# Altium PCB PCB1.PcbDoc
Units mm, origin at the board's own origin, x right, y up, seen from the top; angles counter-clockwise.
Board outline 85 x 101.6 mm, 2 copper layers (Top Layer, Bottom Layer); 72 components, 52 nets, 225 pads, 0 vias.
Unrouted connection lines stored in the file: 138.
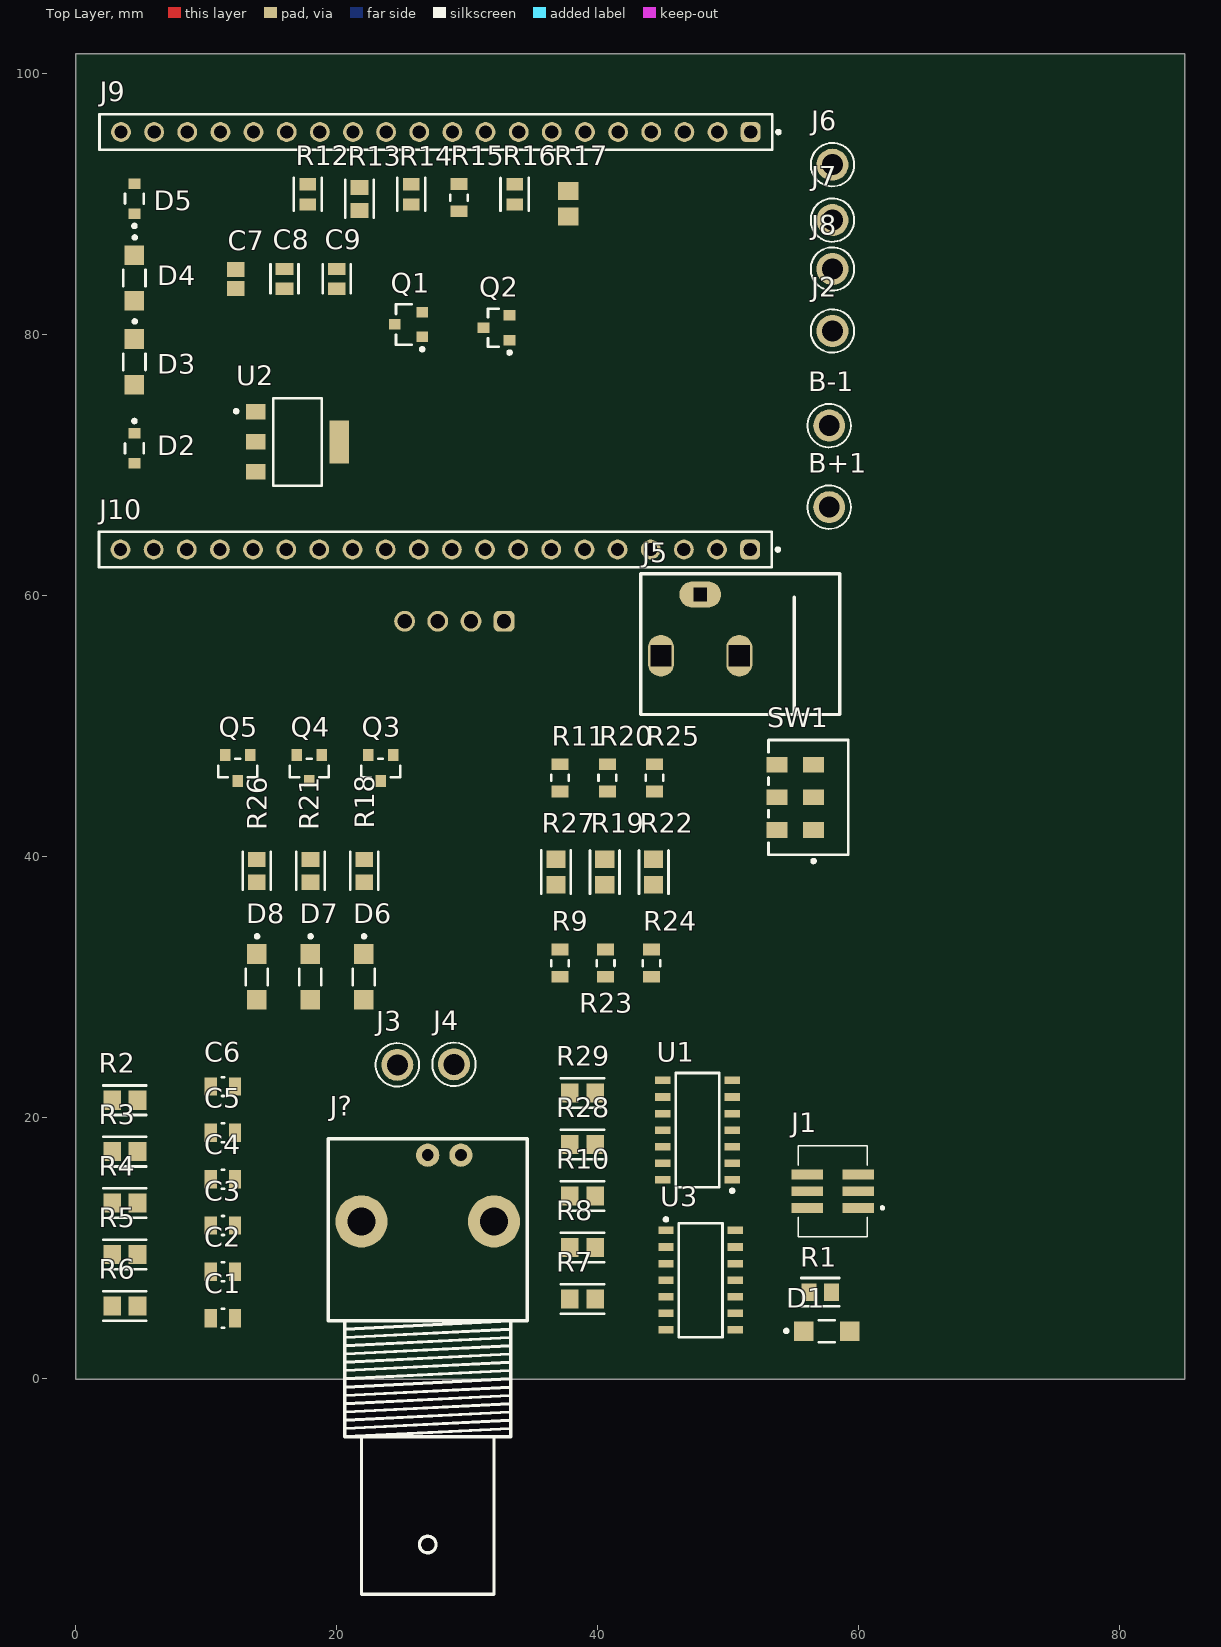
[diagram p0: Top Layer view]
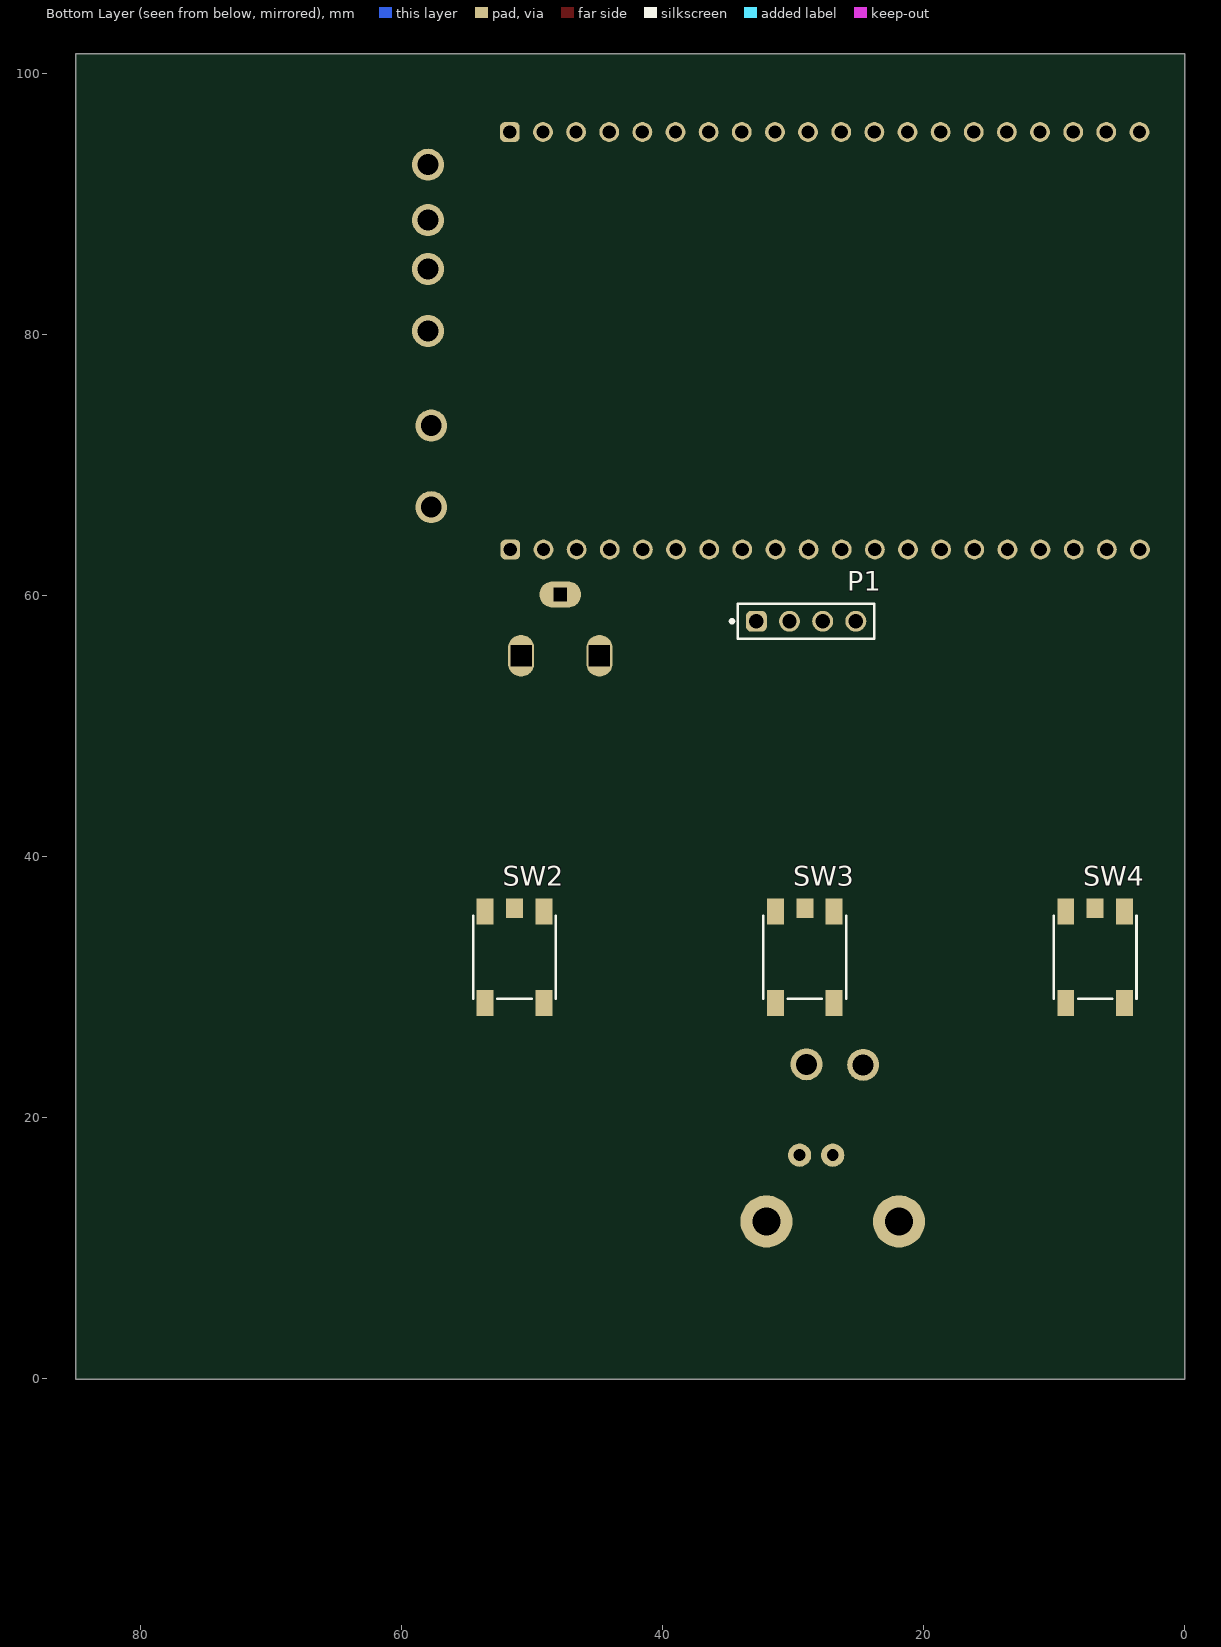
[diagram p1: Bottom Layer view, seen from below]

## Layer stack, top to bottom
Top Solder: solder mask 0.0102, Solder Resist, Dk 3.5
Top Layer: signal copper 0.0356
Dielectric 1: dielectric 0.32, FR-4, Dk 4.8
Bottom Layer: signal copper 0.0356
Bottom Solder: solder mask 0.0102, Solder Resist, Dk 3.5

## Board outline
0,-0.1 85,-0.1 85,101.5 0,101.5

## Design rules (kind name [scope] priority, off if disabled: settings)
Clearance [All] p1: gap=0.254 ignorepadtopadclearanceinfootprint=FALSE
PolygonConnect [All] p1: connectstyle=Relief reliefconductorwidth=0.254 reliefentries=4 polygonreliefangle="90 Angle" airgapwidth=0.254
RoomDefinition r [InComponentClass('r')] p1: confinementstyle=ConfineIn formatcopy=TRUE lockcomponents=FALSE outline 1.073,60.29 54.823,60.29 54.823,98.79 1.073,98.79
RoomDefinition Sheet3 [InComponentClass('Sheet3')] p2: confinementstyle=ConfineIn formatcopy=TRUE lockcomponents=FALSE outline -1.25,99.5 -1.25,38.5 60.25,38.5 60.25,99.5
RoomDefinition Sheet2 [InComponentClass('Sheet2')] p3: confinementstyle=ConfineIn formatcopy=TRUE lockcomponents=FALSE outline 0.9,27.25 0.9,-22.75 52,-22.75 52,27.25
RoomDefinition Sheet4 [InComponentClass('Sheet4')] p4: confinementstyle=ConfineIn formatcopy=TRUE lockcomponents=FALSE outline 2.255,25.75 61,25.75 61,62 2.255,62
RoomDefinition "Top Level" [InComponentClass('Top Level')] p5: confinementstyle=ConfineIn formatcopy=TRUE lockcomponents=FALSE outline 63,1.25 63,20.25 51.5,20.25 51.5,1.25
RoutingVias [All] p1: holewidth=0.711 width=1.27 viastyle="Through Hole" minholewidth=0.711 minwidth=1.27 maxholewidth=0.711 maxwidth=1.27
SolderMaskExpansion [All] p1: expansion=0.102 istentingtop=FALSE
SupplyNets "Schematic Supply Nets_1" [InNet('GND')] p1: voltage=0.000
SupplyNets "Schematic Supply Nets" [InNet('+3V3')] p2: voltage=0.000
Width [All] p1: maxlimit=0.254 minlimit=0.254 preferedwidth=0.254
30 further rules are at their usual default settings.

## Classes and differential pairs
component class "Top Level": J9 J10
component class Sheet4: C1 C2 C3 C4 C5 C6 J3 J4 J? R2 R3 R4 R5 R6 R7 R8 R10 R28 R29 U1 U3
component class Sheet3: D1 J1 R1
component class Sheet2: B+1 B-1 C7 C8 C9 D2 D3 D4 D5 J2 J5 J6 J7 J8 Q1 Q2 R12 R13 R14 R15 R16 R17 SW1 U2
component class r: D6 D7 D8 P1 Q3 Q4 Q5 R9 R11 R18 R19 R20 R21 R22 R23 R24 R25 R26 R27 SW2 SW3 SW4

## Components (designator, comment, footprint, x,y, rotation, side; value= is the part's Value field where it differs from the comment)
B+1 "5006" FP-5006-MFG 57.75,66.75 r270 top
B-1 "5006" FP-5006-MFG 57.75,73 r270 top
C1 "CC0805KRX7R9BB333" FP-CC0805-0_85-MFG 11.285,4.59 r180 top value="33 nF"
C2 "CC0805KRX7R9BB333" FP-CC0805-0_85-MFG 11.285,8.14 r180 top value="33 nF"
C3 "CC0805KRX7R9BB333" FP-CC0805-0_85-MFG 11.285,11.69 r180 top value="33 nF"
C4 "CC0805KRX7R9BB333" FP-CC0805-0_85-MFG 11.285,15.24 r180 top value="33 nF"
C5 "CC0805KRX7R9BB333" FP-CC0805-0_85-MFG 11.285,18.79 r180 top value="33 nF"
C6 "CC0805KRX7R9BB333" FP-CC0805-0_85-MFG 11.285,22.34 r180 top value="33 nF"
C7 "08055C104JAZ2A" CAPC2013X94X50LL20T25 12.25,84.25 r90 top
C8 "C0805C104J5RACTU" FP-C0805C-DN-MFG 16,84.25 r90 top value="0.10 μF"
C9 "C0805C103J5RAC7210" FP-C0805C-DN-MFG 20,84.25 r270 top value="10,000 pF"
D1 "LTST-C150KRKT" FP-LTST-C150KRKT-MFG 57.563,3.581 r0 top
D2 "CUS08F30,H3F" FP-USC-MFG 4.5,71.25 r270 top
D3 "LTST-C150KRKT" FP-LTST-C150KRKT-MFG 4.5,77.883 r270 top
D4 "LTST-C150KRKT" FP-LTST-C150KRKT-MFG 4.5,84.317 r270 top
D5 "CUS08F30,H3F" FP-USC-MFG 4.5,90.4 r90 top
D6 "LTST-C150KRKT" FP-LTST-C150KRKT-MFG 22.07,30.75 r270 top
D7 "LTST-C150KRKT" FP-LTST-C150KRKT-MFG 17.97,30.75 r270 top
D8 "LTST-C150KRKT" FP-LTST-C150KRKT-MFG 13.87,30.75 r270 top
J1 "20021221-00006C4LF" AMPHENOL_20021221-00006C4LF 58.019,14.313 r270 top
J2 "5006" FP-5006-MFG 58,80.25 r270 top
J3 "5006" FP-5006-MFG 24.65,24 r0 top
J4 "5006" FP-5006-MFG 28.99,24.04 r0 top
J5 "PJ-102AH" "CON Barrel PJ-102AH" 47.861,60.054 r180 top
J6 "5006" FP-5006-MFG 58,93 r270 top
J7 "5006" FP-5006-MFG 58,88.75 r270 top
J8 "5006" FP-5006-MFG 58,85 r270 top
J9 "61302011821" 61302011821 27.6,95.5 r180 top
J10 "61302011821" 61302011821 27.56,63.5 r180 top
J? "CON BNC JACK R/A 50 OHM PCB" "CON BNC 90deg" 26.98,17.08 r90 top
P1 "61300411121" 61300411121 29.02,58 r180 bottom
Q1 "SSM3J328R,LF" TOSH-SOT-23F_V 25.5,80.75 r180 top
Q2 "MMBT3904LT1G" ONSC-SOT-23-3-318-08_V 32.25,80.5 r180 top
Q3 "DMN2004K-7" FP-SOT23-MFG 23.37,46.75 r270 top
Q4 "DMN2004K-7" FP-SOT23-MFG 17.895,46.75 r270 top
Q5 "DMN2004K-7" FP-SOT23-MFG 12.42,46.75 r270 top
R1 "RMCF0805JT300R" FP-RMCF0805-IPC_B 57.063,6.581 r0 top
R2 "RMCF0805JT160K" FP-RMCF0805-IPC_A 3.764,21.29 r180 top
R3 "RMCF0805JT160K" FP-RMCF0805-IPC_A 3.764,17.346 r0 top
R4 "RMCF0805JT160K" FP-RMCF0805-IPC_A 3.764,13.401 r0 top
R5 "RMCF0805JT160K" FP-RMCF0805-IPC_A 3.764,9.457 r180 top
R6 "RMCF0805JT160K" FP-RMCF0805-IPC_A 3.764,5.512 r0 top
R7 "RMCF0805JT160K" FP-RMCF0805-IPC_A 38.836,6.062 r180 top
R8 "RMCF0805JT160K" FP-RMCF0805-IPC_A 38.836,10.007 r180 top
R9 "RMCF0805FT10K0" FP-RMCF0805-MFG 37.12,31.8 r270 top
R10 "RMCF0805JT160K" FP-RMCF0805-IPC_A 38.836,13.951 r180 top
R11 "RMCF0805FT10K0" FP-RMCF0805-MFG 37.12,46 r270 top
R12 "RMCF0805JT3K00" FP-RMCF0805-IPC_C 17.776,90.722 r270 top
R13 "RMCF0805JT300R" FP-RMCF0805-IPC_B 21.747,90.372 r90 top
R14 "RMCF0805FG100K" FP-RMCF0805-IPC_C 25.705,90.722 r90 top
R15 "RMCF0805FT10K0" FP-RMCF0805-MFG 29.37,90.475 r90 top
R16 "RMCF0805FT1K00" FP-RMCF0805-IPC_C 33.635,90.722 r270 top
R17 "ERJ-6GEYJ563V" RESC2013X70X40ML20T20 37.75,90 r270 top
R18 "RMCF0805JT300R" FP-RMCF0805-IPC_B 22.11,38.874 r90 top
R19 "RMCF0805FT100R" FP-RMCF0805-IPC_A 40.549,38.774 r270 top
R20 "RMCF0805FT10K0" FP-RMCF0805-MFG 40.745,46 r270 top
R21 "RMCF0805JT300R" FP-RMCF0805-IPC_B 17.99,38.874 r90 top
R22 "RMCF0805FT100R" FP-RMCF0805-IPC_A 44.299,38.774 r90 top
R23 "RMCF0805FT10K0" FP-RMCF0805-MFG 40.62,31.8 r270 top
R24 "RMCF0805FT10K0" FP-RMCF0805-MFG 44.12,31.8 r90 top
R25 "RMCF0805FT10K0" FP-RMCF0805-MFG 44.37,46 r270 top
R26 "RMCF0805JT300R" FP-RMCF0805-IPC_B 13.87,38.874 r90 top
R27 "RMCF0805FT100R" FP-RMCF0805-IPC_A 36.799,38.774 r90 top
R28 "RMCF0805JT160K" FP-RMCF0805-IPC_A 38.836,17.896 r180 top
R29 "RMCF0805JT160K" FP-RMCF0805-IPC_A 38.836,21.84 r0 top
SW1 "CL-SB-22A-11T" FP-CL-SB-22A-11T-MFG 56.15,44.5 r90 top
SW2 "431481031816" 431481031816 51.37,32.25 r270 bottom
SW3 "431481031816" 431481031816 29.12,32.25 r270 bottom
SW4 "431481031816" 431481031816 6.87,32.25 r270 bottom
U1 "LM324DR2G" ONSC-SOIC-14-751A-03_V 47.65,19 r180 top
U2 "LD1117S33CTR" FP-SOT-223-0046067_14-MFG 17,71.75 r0 top
U3 "LM324DR2G" ONSC-SOIC-14-751A-03_V 47.9,7.5 r0 top

## Footprints (in the part's own frame and the unit in brackets; to place one, negate y for a bottom-side part, rotate by r counter-clockwise, add the part's x,y. Pads: shape width x height; smd on the part's side, far side on the other; paste and mask are expansions set on the pad)
61300411121 [mm] "Pin Header, pitch 2.54 mm, THT, Vertical, single row, 4p"
  rrect50% 1.6x1.6 hole 1.1: 1(-3.81,0)
  round 1.6 hole 1.1: 2(-1.27,0) 3(1.27,0) 4(3.81,0)
  silkscreen extent -5.8,-1.35 5.23,1.34, body extent -5.08,-1.27 5.08,1.27, height 8.57
61302011821 [mm] "Socket Header, Pitch 2.54 mm, THT, Vertical, single row, 20p"
  rrect50% 1.52x1.52 hole 1.02: 1(-24.13,0)
  round 1.52 hole 1.02: 2(-21.59,0) 3(-19.05,0) 4(-16.51,0) 5(-13.97,0) 6(-11.43,0) 7(-8.89,0) 8(-6.35,0) 9(-3.81,0) 10(-1.27,0) 11(1.27,0) 12(3.81,0) 13(6.35,0) 14(8.89,0) 15(11.43,0) 16(13.97,0) 17(16.51,0) 18(19.05,0) 19(21.59,0) 20(24.13,0)
  silkscreen extent -26.39,-1.35 25.77,1.35, body extent -25.65,-1.25 25.65,1.25, height 8.55
431481031816 [mm] "SMD Tact Switch, body 6x6mm"
  rect 2x1.3 smd: A1(-3.5,-2.25) A2(3.5,-2.25) B1(-3.5,2.25) B2(3.5,2.25)
  rect 1.5x1.3 smd: G1(-3.75,0)
  silkscreen extent -3.17,-3.18 3.18,3.17, body extent -4,-3.1 4,3.1, height 3.1
AMPHENOL_20021221-00006C4LF [mm]
  rect 0.76x2.4 smd: 1(1.27,1.95) 2(1.27,-1.95) 3(0,1.95) 4(0,-1.95) 5(-1.27,1.95) 6(-1.27,-1.95)
  silkscreen extent -3.5,-2.65 3.5,3.91, body extent -3.4,-2.75 3.4,2.75, height 5.6
CAPC2013X94X50LL20T25 [mm] "Chip Capacitor, 2-Leads, Body 2.01x1.25mm, IPC High Density"
  rect 1.15x1.35 smd: 1(-0.725,0) 2(0.725,0)
  body extent -1.1,-0.72 1.1,0.72, height 0.94
"CON Barrel PJ-102AH" [mm] "5.5mm Barrel Plug (2.1mm ID)"
  oval 2x3.2 hole 1.6 square: 1(3,4.7) 2(-3,4.7)
  oval 3.2x2 hole 1 square: 3(0,0)
  silkscreen extent -10.7,-1.6 4.55,9.2, body extent -10.65,-0.25 3.75,9.15, height 11.01
"CON BNC 90deg" [mil] "BNC INSULATED 90 Degrees"
  round 70 hole 36: 1(0,0) 2(0,-100)
  round 157.48 hole 84: ""(-200,-200) ""(-200,200)
  silkscreen extent -1325,-300 50,300, body extent -1290,-290 90,291, height 605
FP-5006-MFG [mm]
  round 2.45 hole 1.6 paste-2539.97 mask+0: 1(0,0)
  silkscreen extent -1.66,-1.66 1.66,1.67, body extent -1.77,-1.77 1.77,1.77, height 0.25
FP-C0805C-DN-MFG [mm]
  rect 0.95x1.35 smd paste+0 mask+0: 1(-0.75,0) 2(0.75,0)
  silkscreen extent -1.1,-1.08 1.1,1.07, body extent -1.4,-0.85 1.4,0.85, height 0.25
FP-CC0805-0_85-MFG [mm]
  rect 0.95x1.4 smd paste+0 mask+0: 1(-0.925,0) 2(0.925,0)
  silkscreen extent -0.08,-0.73 0.07,0.73, body extent -1.6,-1.05 1.6,1.05, height 0.25
FP-CL-SB-22A-11T-MFG [mm]
  rect 1.2x1.6 smd paste+0 mask+0: 1(-2.5,-0.4) 2(0,-0.4) 3(2.5,-0.4) 4(-2.5,2.4) 5(0,2.4) 6(2.5,2.4)
  silkscreen extent -5,-3.05 4.4,3.05, body extent -4.5,-3.15 4.5,3.3, height 0.25
FP-LTST-C150KRKT-MFG [mm]
  rect 1.5x1.5 smd paste+0 mask+0: 1(-1.75,0) 2(1.75,0)
  silkscreen extent -3.22,-0.85 0.63,0.85, body extent -2.6,-0.95 2.6,0.95, height 0.25
FP-RMCF0805-IPC_A [mm]
  rect 1.355x1.462 smd paste+0 mask+0: 1(-0.976,0) 2(0.976,0)
  silkscreen extent -1.65,-1.13 1.65,1.13, body extent -2.15,-1.23 2.15,1.23, height 0.25
FP-RMCF0805-IPC_B [mm]
  rect 1.155x1.362 smd paste+0 mask+0: 1(-0.876,0) 2(0.876,0)
  silkscreen extent -1.45,-1.08 1.45,1.08, body extent -1.7,-0.93 1.7,0.93, height 0.25
FP-RMCF0805-IPC_C [mm]
  rect 0.955x1.262 smd paste+0 mask+0: 1(-0.776,0) 2(0.776,0)
  silkscreen extent -1.25,-1.07 1.25,1.08, body extent -1.35,-0.77 1.35,0.77, height 0.25
FP-RMCF0805-MFG [mm]
  rect 0.9x1.3 smd paste+0 mask+0: 1(-1.05,0) 2(1.05,0)
  silkscreen extent -0.23,-0.67 0.22,0.68, body extent -1.6,-0.77 1.6,0.77, height 0.25
FP-SOT23-MFG [mm]
  rect 0.9x0.8 smd paste+0 mask+0: 1(-1,0.95) 2(-1,-0.95) 3(1,0)
  silkscreen extent -0.7,-1.5 0.7,1.5, body extent -1.55,-1.6 1.55,1.6, height 0.25
FP-SOT-223-0046067_14-MFG [mm]
  rect 1.5x1.2 smd paste+0 mask+0: 1(-3.2,2.3) 2(-3.2,0) 3(-3.2,-2.3)
  rect 1.5x3.3 smd paste+0 mask+0: 4(3.2,0)
  silkscreen extent -4.82,-3.35 1.85,3.35, body extent -4.05,-3.45 4.05,3.45, height 0.25
FP-USC-MFG [mm]
  rect 0.8x0.9 smd paste+0 mask+0: 1(-1.15,0) 2(1.15,0)
  silkscreen extent -2.22,-0.72 0.37,0.73, body extent -1.65,-0.82 1.65,0.82, height 0.25
ONSC-SOIC-14-751A-03_V [mm] "SOIC, 14-Leads, Body 8.75x4mm, Pitch 1.27mm"
  rect 1.18x0.58 smd: 1(-2.66,3.81) 2(-2.66,2.54) 3(-2.66,1.27) 4(-2.66,0) 5(-2.66,-1.27) 6(-2.66,-2.54) 7(-2.66,-3.81) 8(2.66,-3.81) 9(2.66,-2.54) 10(2.66,-1.27) 11(2.66,0) 12(2.66,1.27) 13(2.66,2.54) 14(2.66,3.81)
  silkscreen extent -2.79,-4.38 1.67,4.77, body extent -2,-4.38 2,4.38, height 1.75
ONSC-SOT-23-3-318-08_V [mm] "SOT23, 3-Leads, Body 2.92x1.3mm, Pitch 0.95mm"
  rect 0.9x0.8 smd: 1(-1,0.95) 2(-1,-0.95) 3(1,0)
  silkscreen extent -1.13,-1.46 0.65,2.02, body extent -0.65,-1.46 0.65,1.46, height 1.11
RESC2013X70X40ML20T20 [mm] "Chip Resistor, 2-Leads, Body 2.00x1.25mm, IPC Low Density"
  rect 1.35x1.55 smd: 1(-0.975,0) 2(0.975,0)
  body extent -1.1,-0.72 1.1,0.72, height 0.7
TOSH-SOT-23F_V [mm] "SOTFL, 3-Leads, Body 3.1x1.9mm, Pitch 0.95mm"
  rect 0.9x0.8 smd: 1(-1.05,0.95) 2(-1.05,-0.95) 3(1.05,0)
  silkscreen extent -1.18,-1.55 0.95,2.02, body extent -1.2,-1.55 1.2,1.55, height 0.88

## Part data
B+1 B-1 J2 J3 J4 J6 J7 J8: library part CMP-19636-000022-1, "PC TEST POINT COMPACT BLACK", Color=Black, Flammability Rating="UL94 V-0", Package Quantity=100, Body Material=Bronze, Contact Material=Bronze, Contact Plating=Tin, Height=0.35inch, Hole Diameter=1.6mm, Housing Color=Black, Inside Diameter=1.78mm, Insulation Material=Nylon, Lead Free="Lead Free", Length=8.89mm, Material=Nylon, Mount=PCB, Number of Ports=1, Orientation=Straight, Outside Diameter=3.18mm, Packaging=Bulk, Plating=Silver, REACH SVHC="No SVHC", RoHS Compliant=Yes, Series=THM
C1 C2 C3 C4 C5 C6: library part CMP-03422-000099-1, "CAP CER 0.033UF 50V X7R 0805", Capacitance="33 nF", Manufacturer=Yageo, Package=CC0805-0.85, Temperature="-30°C to +85°C", Temperature Characteristic=X7R, Temperature Range High=+85°C, Temperature Range Low=-30°C, Tolerance=0.1, Voltage Rating="50 V", Automotive=No, Category=Cap, ComponentLink2Description=Datasheet, ComponentLink2URL=http://www.yageo.com/documents/recent/UPY-GPHC_Y5V_6.3V-to-50V_8.pdf, Device Class L1="Passive Components", Device Class L2=Capacitors, Device Class L3="Ceramic Capacitors", Digikey Description="CAP CER 0.033UF 50V X7R 0805", Footprint Url=http://www.yageo.com/exep/pages/download/literatures/UPY-C_GEN_24.pdf, Height=0.95mm, Ipc Land Pattern Name=CAPC200125X85, Lead Free=Yes, Manufacturer Part Number=CC0805KRX7R9BB333, Material=Ceramic, Mouser Description="Multilayer Ceramic Capacitors MLCC - SMD/SMT 33nF 50V X7R 10%", Octopart=https://octopart.com/cc0805krx7r9bb333-yageo-42333931, RoHS=TRUE
C7: library part CMP-2007-04369-1, Manufacturer="AVX Interconnect / Elco", Part Number=08055C104JAZ2A
C8: library part CMP-03020-000950-1, "CAP CER 0.1UF 50V X7R 0805", Capacitance="0.10 μF", Manufacturer=KEMET, Package=C0805C-DN, Temperature="-55°C to +125°C", Temperature Characteristic=X7R, Temperature Coefficient=30ppm/°C, Temperature Range High=+125°C, Temperature Range Low=-55°C, Tolerance=0.05, Voltage Rating="50 V", Automotive=No, Category=Cap, ComponentLink2Description=Datasheet, ComponentLink2URL=https://content.kemet.com/datasheets/KEM_C1003_C0G_SMD.pdf, Device Class L1="Passive Components", Device Class L2=Capacitors, Device Class L3="Ceramic Capacitors", Digikey Description="CAP CER 0.1UF 50V X7R 0805", Height=0.88mm, Ipc Land Pattern Name=CAPC200125X78, Lead Free=Yes, Manufacturer Part Number=C0805C104J5RACTU, Material=Ceramic, Mouser Description="Multilayer Ceramic Capacitors MLCC - SMD/SMT 50volts 0.1uF X7R 5%", Octopart=https://octopart.com/c0805c104j5ractu-kemet-104634, RoHS=TRUE
C9: library part CMP-2007-01173-3, "CAP CER SMD 0805 .01UF X7R 5% 50", Capacitance="10,000 pF", Manufacturer=KEMET, Package=C0805C-DN, Temperature="-55°C to +125°C", Temperature Characteristic=X7R, Temperature Coefficient=30ppm/°C, Temperature Range High=+125°C, Temperature Range Low=-55°C, Tolerance=0.05, Voltage Rating="50 V", Automotive=No, Category=Cap, ComponentLink2Description=Datasheet, ComponentLink2URL=https://content.kemet.com/datasheets/KEM_C1003_C0G_SMD.pdf, Device Class L1="Passive Components", Device Class L2=Capacitors, Device Class L3="Ceramic Capacitors", Digikey Description="CAP CER SMD 0805 .01UF X7R 5% 50", Height=0.88mm, Ipc Land Pattern Name=CAPC200125X78, Lead Free=Yes, Manufacturer Part Number=C0805C103J5RAC7210, Material=Ceramic, Mouser Description="Cap Ceramic 0.01uF 50V X7R 5% Pad SMD 0805 125C T/R", Octopart=https://octopart.com/c0805c103j5rac7210-kemet-3921106, RoHS=TRUE
D1 D3 D4 D6 D7 D8: library part CMP-2000-06617-2, "LED RED CLEAR 1206 SMD", Case Code (Imperial)=1206, Case Code (Metric)=3216, Color=Red, Forward Current=30mA, Forward Voltage=2V, Lens Color=Colorless, Max Operating Temperature=85°C, Min Operating Temperature=-30°C, Package Quantity=1, Power Dissipation=62.5mW, Power Rating=75mW, Reverse Voltage=5V, Test Current=20mA, Case/Package=1206, Depth=1.6mm, Dominant Wavelength=631nm, Height=1.1mm, Illumination Color=Red, Lead Free="Lead Free", Length=3.2mm, Lens Style=Diffused, Lens Transparency=Clear, Luminous Intensity=54mcd, Mount="Surface Mount", Number of Elements=1, Number of LEDs=1, Number of Pins=2, Packaging="Tape and Reel", Radiation Hardening=No, Viewing Angle=130°, Wavelength=639nm, Width=1.6mm
D2 D5: library part CMP-00375-53632863-1, "CUS08F30,H3F Rectifier Diode, Schottky, 1 Phase, 1 Element, 0.8A, 30V V(RRM), Silicon", Average Rectified Current=800mA, Capacitance=170pF, Case/Package=SOD, Max Forward Surge Current (Ifsm)=5A, Max Junction Temperature (Tj)=125°C, Max Repetitive Reverse Voltage (Vrrm)=30V, Min Operating Temperature=-55°C, Peak Reverse Current=50µA, Contact Plating="Silver, Tin", Element Configuration=Single, Forward Current=800mA, Height=1.15mm, Max Operating Temperature=125°C, Max Reverse Voltage (DC)=30V, Mount="Surface Mount", NexarPartId=53632863, Number of Pins=2, Packaging=Digi-Reel®, Peak Non-Repetitive Surge Current=5A, Reverse Voltage=30V, RoHS=Compliant, Schedule B="8541100080, 8541100080"
J1: Package=None, Availability=Unavailable, MF="Amphenol ICC", MP=20021221-00006C4LF, Price=None
J5: library part "CON PWR PJ-102AH", "Power Barrel Con, 2.0mm ID, 5.5mm OD, 5A", Manufacturer="CUI Devices", Digikey Order=CP-102AH-ND, Manufacturer Code=PJ-102AH, Supplier 1="Arrow Electronics", Supplier Part Number 1=PJ-102AH
J9 J10: library part CMP-1502-01348-3, Contact Resistance=20mΩ, Current Rating=3A, Operating Supply Voltage=250V, Gender=Female, Lead Pitch=2.54mm, NexarPartId=61924744, Number of Pins=20, Orientation=Vertical, RoHS=Non-Compliant
J?: "BNC Connector Jack, Female Socket 50Ohm Panel Mount, Through Hole, Right Angle Solder", Manufacturer="TE Connectivity AMP Connectors", Manufacturer Code=1-1634613-0, Supplier Part Number 1=6807399, Digikey Order=A97554-ND, Supplier 1=Rs
P1: library part CMP-1502-01064-3, Color=Black, Contact Resistance=20mΩ, Current Rating=3A, Max Operating Temperature=105°C, Min Operating Temperature=-40°C, Operating Supply Voltage=250V, Connector Type="Male Pin", Contact Material=Copper, Contact Mating Length=5.9944mm, Contact Plating=Gold, Gender=Male, Height=8.89mm, Lead Free="Lead Free", Lead Pitch=2.54mm, Mount="Through Hole", NexarPartId=32855522, Number Of Contacts=4, Number of Pins=4, Number of Positions=4, Number of Rows=1, Orientation=Vertical, Packaging=Bulk, Pitch=2.54mm, REACH SVHC=Unknown, RoHS=Compliant, Termination=Solder, Voltage Rating=250V
Q1: library part CMP-2100-03686-1, "TOSHIBA Field-Effect Transistor Silicon P-Channel MOS Type (U-MOS VI), 20 V, -55 to 125 degC, 3-Pin SOTFL, RoHS, Tape and Reel", Case/Package=SOT-23-3, Continuous Drain Current (ID)=6A, Drain To Source Breakdown Voltage=-20V, Drain To Source Resistance=47.4mOhm, Drain to Source Voltage (Vdss)=20V, Gate to Source Voltage (Vgs)=8V, Input Capacitance=840pF, Manufacturer=Toshiba, Max Operating Temperature=150degC, Max Power Dissipation=1W, Min Operating Temperature=-55degC, Package Description="3-Pin Small Outline Transistor, Flat Lead, Body 2.9 x 1.8 mm, Pitch 0.95 mm", Package Quantity=3000, Package Reference=SOT-23F, Power Dissipation=2W, Datasheet URL=https://toshiba.semicon-storage.com/info/docget.jsp?did=2429&prodName=SSM3J328R, Datasheet Version=41699.0, Element Configuration=Single, Manufacturer URL=http://www.toshiba.com/, Mount=SurfaceMount, Number Of Channels=1, Number of Elements=1, Number of Pins=3, Package URL=https://toshiba.semicon-storage.com/ap-en/design-support/package/detail.SOT-23F.html, Packaging=TapeandReel, Radiation Hardening=No, Rds On Max=29.8mOhm, RoHSCompliant=true, Turn-Off Delay Time=107ns, Turn-On Delay Time=32ns
Q2: library part CMP-1048-00631-1, "General Purpose Transistor, NPN Silicon, 3-Pin SOT-23, Pb-Free, Tape and Reel", Manufacturer="On Semiconductor", ComponentLink1Description="Manufacturer URL", ComponentLink1URL=http://www.onsemi.com/, ComponentLink2Description=Datasheet, ComponentLink2URL=http://www.onsemi.cn/pub_link/Collateral/MMBT3904LT1-D.PDF, ComponentLink3Description="Package Specification", ComponentLink3URL=http://www.onsemi.cn/pub_link/Collateral/318-08.PDF, DatasheetVersion="Rev. 12", fT Min (MHz)=300, IC Continuous (A)=0.2, Mounting Technology="Surface Mount", PackageDescription="3-Pin Small Outline Transistor, Body 2.92 x 1.3 mm, Pitch 0.95 mm", PackageReference=SOT-23-3-318-08, PackageVersion="Rev. AP, 11/2009", Packing="Tape and Reel", PartNumber=MMBT3904LT1G, Polarity=NPN, RoHS=TRUE
Q3 Q4 Q5: library part CMP-12801-000057-1, "MOSFET N-CH 20V 0.63A SOT23-3", Continuous Drain Current=630mA, Drain To Source Breakdown Voltage=20V, Drain To Source Resistance=0.4Ω, Gate To Source Voltage=8V, Input Capacitace At Vds="150pF @ 16V", Manufacturer="Diodes Inc.", Max Forward Diode Voltage=1V, Max Junction Temp=+150°C, Package=SOT23, Power Dissipation=350mW, Pulse Drain Current=1.5A, Temperature="-65°C to +150°C", Temperature Range Low=-65°C, Automotive=Yes, Automotive Grade="Grade 0", Category=Trans, ComponentLink2Description=Datasheet, ComponentLink2URL=https://www.diodes.com/assets/Datasheets/ds30938.pdf, Depletion Mode=False, Device Class L1="Discrete Semiconductors", Device Class L2=Transistors, Device Class L3=MOSFETs, Digikey Description="MOSFET N-CH 20V 0.63A SOT23-3", Drain To Source Voltage=20V, Footprint Url=https://www.diodes.com/assets/Package-Files/SOT23.pdf, Gate Charge At Vgs="0.9nC @ 4.5V", Height=1.1mm, Lead Free=Yes, Manufacturer Part Number=DMN2004K-7, Mouser Description="MOSFET 20V 540mA", Number Of Channels=1, Number Of N Channels=1, Octopart=https://octopart.com/dmn2004k-7-diodes+inc.-7127688, Reverse Recovery Charge=0.85nC, Reverse Recovery Time=5.5ns, RoHS=TRUE, Rthja Max=357°C/W, Standoff Height=0.013mm, Temperature Range High=+150°C, Threshold Vgs Max=1V, Threshold Vgs Min=0.5V, Turn Off Delay Time=59.4ns, Turn On Delay Time=5.7ns
R1 R13 R18 R21 R26: library part CMP-26527-003681-1, "300Ω ±5% 0.125W 0805 Thick Film Chip Resistor AEC-Q200 compliant", Case Code (Imperial)=0805, Case Code (Metric)=2012, Max Operating Temperature=155°C, Max Power Dissipation=125mW, Min Operating Temperature=-55°C, Package Quantity=5000, Resistance=300R, Resistor Type="Thick Film", Temperature Coefficient=200ppm/°C, Tolerance=5%, Case/Package=0805, Contact Plating=Tin, Features="Automotive AEC-Q200", Height=0.026inch, Length=0.079inch, Mount="Surface Mount", Number of Terminations=2, Packaging="Tape and Reel", Radiation Hardening=No, RoHS Compliant=Yes, Series=RMCF, Width=0.049inch
R2 R3 R4 R5 R6 R7 R8 R10 R28 R29: library part CMP-26527-003058-1, "160kΩ ±5% 0.125W 0805 Thick Film Chip Resistor AEC-Q200 compliant", Case Code (Imperial)=0805, Case Code (Metric)=2012, Max Operating Temperature=155°C, Max Power Dissipation=125mW, Min Operating Temperature=-55°C, Resistance=160kR, Resistor Type="Thick Film", Temperature Coefficient=200ppm/°C, Tolerance=5%, Case/Package=0805, Contact Plating=Tin, Features="Automotive AEC-Q200", Height=0.026inch, Lead Free="Lead Free", Length=0.079inch, Mount="Surface Mount", Number of Terminations=2, Packaging="Tape and Reel", Radiation Hardening=No, RoHS Compliant=Yes, Series=RMCF, Width=0.049inch
R9 R11 R15 R20 R23 R24 R25: library part CMP-26527-000121-1, "RES 10K OHM 1% 1/8W 0805", Case Code (Imperial)=0805, Case Code (Metric)=2012, Max Operating Temperature=155°C, Max Power Dissipation=125mW, Min Operating Temperature=-55°C, Resistance=10kR, Resistor Type="Thick Film", Temperature Coefficient=100ppm/°C, Tolerance=1%, Case/Package=0805, Construction=Rectangular, Contact Plating=Tin, Depth=1.25mm, Features="Automotive AEC-Q200", Height=0.026inch, Lead Free="Lead Free", Length=2mm, Military Standard=Not, Mount="Surface Mount", Number of Terminations=2, Packaging="Tape and Reel", Power Rating=125mW, Radiation Hardening=No, RoHS Compliant=Yes, Series=RMCF, Size Code=0805, Width=0.049inch
R12: library part CMP-26527-006913-1, "3kΩ ±5% 0.125W 0805 Thick Film Chip Resistor AEC-Q200 compliant", Case Code (Imperial)=0805, Case Code (Metric)=2012, Max Operating Temperature=155°C, Max Power Dissipation=125mW, Min Operating Temperature=-55°C, Resistance=3kR, Resistor Type="Thick Film", Temperature Coefficient=200ppm/°C, Tolerance=5%, Case/Package=0805, Construction=Rectangular, Contact Plating=Tin, Depth=1.25mm, Features="Automotive AEC-Q200", Height=0.026inch, Length=0.079inch, Military Standard=Not, Mount="Surface Mount", Number of Terminations=2, Packaging="Tape and Reel", Radiation Hardening=No, RoHS Compliant=Yes, Series=RMCF, Width=0.049inch
R14: library part CMP-26527-003818-1, "100kΩ ±1% 0.125W 0805 Thick Film Chip Resistor AEC-Q200 compliant", Case Code (Imperial)=0805, Case Code (Metric)=2012, Max Operating Temperature=155°C, Max Power Dissipation=125mW, Min Operating Temperature=-55°C, Package Quantity=10000, Resistance=100kR, Resistor Type="Thick Film", Temperature Coefficient=100ppm/°C, Tolerance=1%, Case/Package=0805, Construction=Rectangular, Contact Plating=Tin, Depth=1.25mm, Features="Automotive AEC-Q200", Height=0.026inch, Length=0.079inch, Military Standard=Not, Mount="Surface Mount", Number of Terminations=2, Packaging="Tape and Reel", Radiation Hardening=No, RoHS Compliant=Yes, Series=RMCF, Width=0.049inch
R16: library part CMP-26527-002331-1, "1kΩ ±1% 0.125W 0805 Thick Film Chip Resistor AEC-Q200 compliant", Case Code (Imperial)=0805, Case Code (Metric)=2012, Max Operating Temperature=155°C, Max Power Dissipation=125mW, Min Operating Temperature=-55°C, Resistance=1kR, Resistor Type="Thick Film", Temperature Coefficient=100ppm/°C, Tolerance=1%, Case/Package=0805, Construction=Rectangular, Contact Plating=Tin, Depth=1.25mm, Features="Automotive AEC-Q200", Height=0.026inch, Lead Free="Lead Free", Length=2mm, Military Standard=Not, Mount="Surface Mount", Number of Terminations=2, Packaging="Tape and Reel", Power Rating=125mW, Radiation Hardening=No, RoHS Compliant=Yes, Series=RMCF, Size Code=0805, Width=0.049inch
R17: library part CMP-2001-00434-1, Manufacturer=Panasonic, Part Number=ERJ-6GEYJ563V
R19 R22 R27: library part CMP-26527-001731-1, "100Ω ±1% 0.125W 0805 Thick Film Chip Resistor AEC-Q200 compliant", Case Code (Imperial)=0805, Case Code (Metric)=2012, Max Operating Temperature=155°C, Max Power Dissipation=125mW, Min Operating Temperature=-55°C, Power Rating=250mW, Resistance=100R, Resistor Type="Thick Film", Temperature Coefficient=100ppm/°C, Tolerance=1%, Case/Package=0805, Construction=Rectangular, Contact Plating=Tin, Depth=1.25mm, Features="Automotive AEC-Q200", Height=0.026inch, Lead Free="Lead Free", Length=2mm, Military Standard=Not, Mount="Surface Mount", Number of Terminations=2, Packaging="Tape and Reel", Radiation Hardening=No, RoHS Compliant=Yes, Series=RMCF, Size Code=0805, Width=0.049inch
SW1: library part CMP-71745-000011-1, "SWITCH SLIDE DPDT 200MA 12V", Current Rating=200mA, Max Operating Temperature=85°C, Min Operating Temperature=-40°C, Operating Force=153gf, Voltage Rating (DC)=12V, Actuator Length=2mm, Actuator Material=Nylon, Actuator Type=Standard, Contact Material=Copper, Contact Plating=Silver, Contact Style=Non-Shorting, Electrical Life=10000Cycles, Mount="Surface Mount", Packaging="Cut Tape", Series=CL-SB, Switch Function=On-On, Switch Travel=2mm, Throw Configuration=DPDT
SW2 SW3 SW4: library part CMP-1457-00011-3, "Tactile Switch, 0.05A, 12Vdc, 160Gf, Smd Rohs Compliant: Yes", Current Rating=50mA, Insulation Resistance=100MΩ, Max Operating Temperature=85°C, Min Operating Temperature=-40°C, Voltage Rating=12V, Actuator Material="Liquid Crystal Polymer, Polymer", Contact Plating=Silver, Height=3.1mm, Illumination Type=Non-Illuminated, Mechanical Life=1Mcycles, Mount="Surface Mount", Packaging="Tape and Reel", RoHS=Compliant, Switch Function=Off-Mom, Switch Travel=250µm, Termination=SMD/SMT, Throw Configuration=SPST
U1 U3: library part CMP-1310-00171-1, "Single Supply Quad Operational Amplifier, 3 to 32 V, 0 to 70 degC, 14-Pin SOIC, Pb-Free, Tape and Reel", Manufacturer="On Semiconductor", ComponentLink1Description="Manufacturer URL", ComponentLink1URL=http://www.onsemi.com/, ComponentLink2Description=Datasheet, ComponentLink2URL=http://www.onsemi.cn/pub_link/Collateral/LM324-D.PDF, ComponentLink3Description="Package Specification", ComponentLink3URL=http://www.onsemi.com/pub_link/Collateral/751A-03.PDF, DatasheetVersion="Rev. 25", Mounting Technology="Surface Mount", PackageDescription="14-Pin Small Outline Integrated Circuit, Body 8.65 x 3.9 mm, Pitch 1.27 mm", PackageReference=SOIC-14-751A-03, PackageVersion="Rev. K, 05/2011", Packing="Tape and Reel", PartNumber=LM324DR2G, RoHS=TRUE, VCC Max (V)=32, VCC Min (V)=3
U2: library part CMP-0244-00307-2, "IC REG LINEAR 3.3V 800MA SOT223", Case/Package=SOT-223, Dropout Voltage=1.1V, Input Bias Current=5mA, Max Input Voltage=15V, Max Operating Temperature=125°C, Max Output Current=1.3A, Max Output Voltage=3.3V, Max Power Dissipation=12W, Min Input Voltage=5.3V, Min Operating Temperature=-40°C, Output Current=950mA, Output Voltage Accuracy=1%, Package Quantity=1, Quiescent Current=10mA, Accuracy=1%, Contact Plating=Tin, Height=1.8mm, Lead Free="Lead Free", Length=6.5mm, Max Supply Voltage=15V, Min Output Voltage=3.3V, Min Supply Voltage=3.3V, Mount="Surface Mount", Nominal Output Voltage=3.3V, Number of Outputs=1, Number of Pins=4, Number of Regulators=1, Number of Terminals=4, Output Type=Fixed, Output Voltage=3.3V, Packaging="Tape and Reel", Polarity=Positive, Power Dissipation=12W, Radiation Hardening=No, REACH SVHC="No SVHC", Termination=SMD/SMT, Weight=0.01lb, Width=3.5mm

## Nets (pads, with @x,y where several pads share a name; then routed paths per layer and width w, separated by ;. In a path a pad name is that pad's centre, name@x,y a point inside that pad or via, vN(x,y) a via of type N, cw(c..) or ccw(c..) an arc to the next point about the centre after c; other vN are vias at no path point)
+3V3: C8.1 D1.2 D4.2 D6.2 D7.2 D8.2 J1.1 J6.1 P1.1 R5.1 R10.1 SW2.A1 SW3.A1 SW4.A1 U1.11 U2.2 U3.11
GND: B-1.1 C2.2 C4.2 C6.2 C7.1 C8.2 C9.2 J1.3 J5.2 J5.3 J7.1 J?.2 P1.2 Q2.2 Q3.2 Q4.2 Q5.2 R1.2 R4.2 R6.2 R9.2 R11.2 R12.1 R13.2 R17.1 R20.2 R23.2 R24.2 R25.2 SW1.3 SW1.6 SW2.G1 SW3.G1 SW4.G1 U1.4 U2.1 U3.4
NetB+1_1: B+1.1 Q1.3 R14.1 SW1.2
NetC1_1: C1.1 R2.2 R3.1
NetC1_2: C1.2 J3.1 J10.13 U3.1 U3.2
NetC2_1: C2.1 R3.2 U3.3
NetC3_1: C3.1 R7.2 R8.1
NetC3_2: C3.2 J4.1 J10.14 U3.6 U3.7
NetC4_1: C4.1 R8.2 U3.5
NetC5_1: C5.1 R28.2 R29.1
NetC5_2: C5.2 J10.16 J?.1 U3.8 U3.9
NetC6_1: C6.1 R29.2 U3.10
NetC7_2: C7.2 D2.1 D3.2 D5.1 U2.3
NetC9_1: C9.1 J10.15 R15.2 R17.2
NetD1_1: D1.1 R1.1
NetD2_2: D2.2 J2.1 SW1.1
NetD3_1: D3.1 R12.2
NetD4_1: D4.1 R13.1
NetD5_2: D5.2 J8.1 SW1.4
NetD6_1: D6.1 R18.1
NetD7_1: D7.1 R21.1
NetD8_1: D8.1 R26.1
NetJ1_2: J1.2 U1.10
NetJ1_4: J1.4 U1.5
NetJ1_5: J1.5 J9.2
NetJ1_6: J1.6 U1.3
NetJ5_1: J5.1 SW1.5
NetJ9_3: J9.3 P1.3
NetJ9_6: J9.6 P1.4
NetJ9_13: J9.13 R16.1
NetJ10_6: J10.6 R19.1 R20.1
NetJ10_8: J10.8 R9.1 R27.1
NetJ10_9: J10.9 R11.1 SW4.B2
NetJ10_10: J10.10 R25.1 SW3.B2
NetJ10_11: J10.11 R22.1 R23.1
NetJ10_12: J10.12 R24.1 SW2.B2
NetQ1_1: Q1.1 Q2.3 R14.2
NetQ1_2: Q1.2 R15.1
NetQ2_1: Q2.1 R16.2
NetQ3_1: Q3.1 R19.2
NetQ3_3: Q3.3 R18.2
NetQ4_1: Q4.1 R22.2
NetQ4_3: Q4.3 R21.2
NetQ5_1: Q5.1 R27.2
NetQ5_3: Q5.3 R26.2
NetR2_1: R2.1 U1.1 U1.2
NetR4_1: R4.1 R10.2 U1.12
NetR5_2: R5.2 R6.1 U3.12
NetR7_1: R7.1 U1.6 U1.7
NetR28_1: R28.1 U1.8 U1.9
NetU1_13: U1.13 U1.14
NetU3_13: U3.13 U3.14
pads on no net: J9.1 J9.4 J9.5 J9.7 J9.8 J9.9 J9.10 J9.11 J9.12 J9.14 J9.15 J9.16 J9.17 J9.18 J9.19 J9.20 J10.1 J10.2 J10.3 J10.4 J10.5 J10.7 J10.17 J10.18 J10.19 J10.20 J?. SW2.A2 SW2.B1 SW3.A2 SW3.B1 SW4.A2 SW4.B1 U2.4